# Altium PCB lm317-adjustable.PcbDoc
Units mm, origin at the board's own origin, x right, y up, seen from the top; angles counter-clockwise.
Board outline 63 x 22 mm, 2 copper layers (Top Layer, Bottom Layer), stack 1.569 mm thick; 10 components, 4 nets, 26 pads, 0 vias.
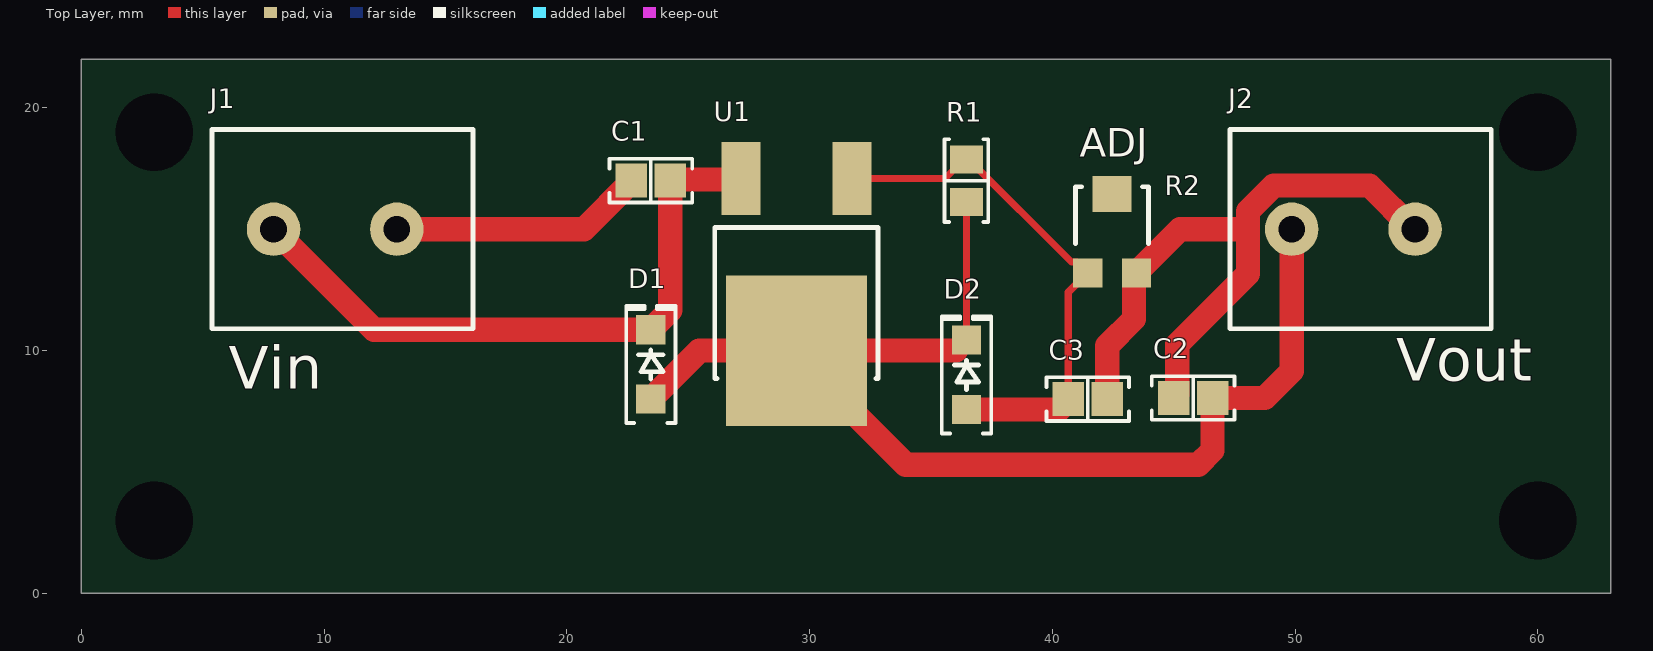
[diagram p0: Top Layer view]
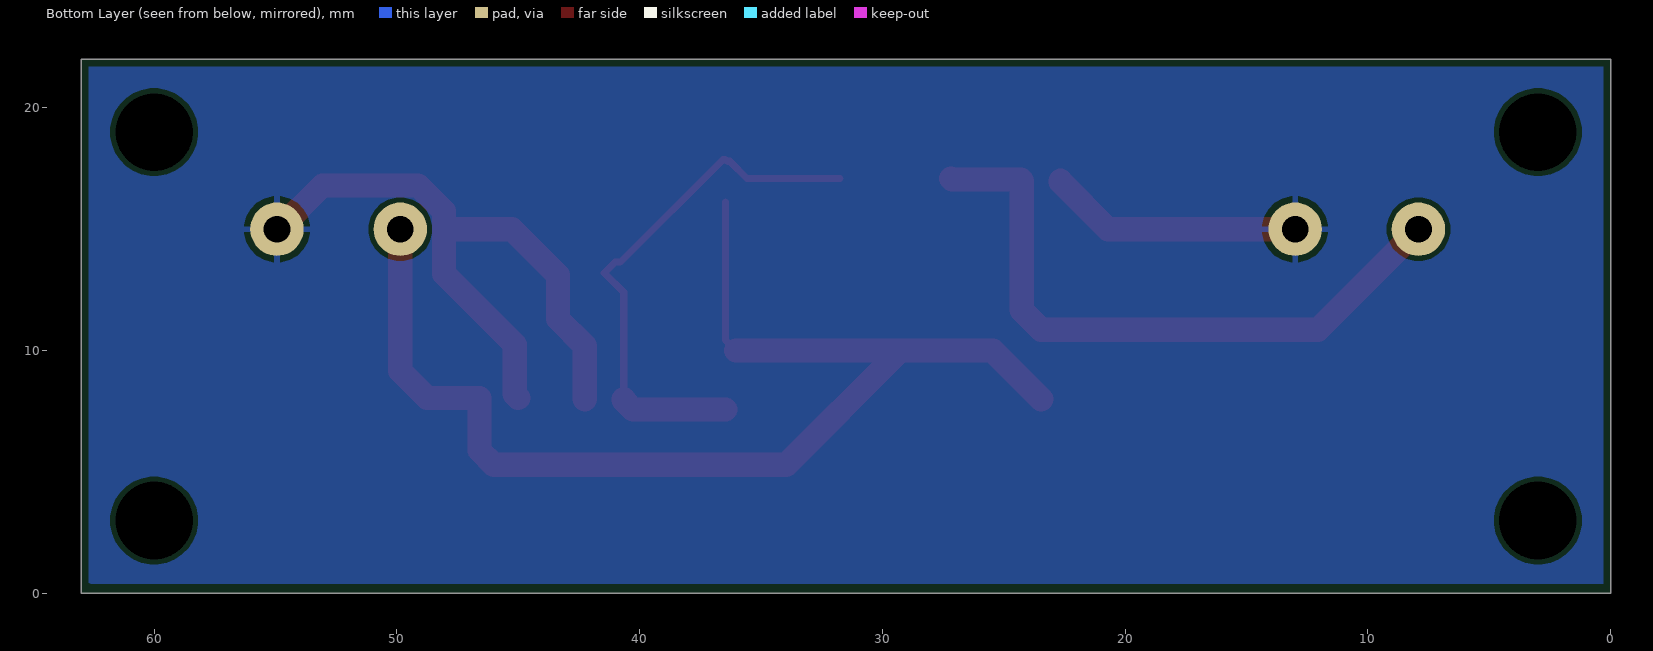
[diagram p1: Bottom Layer view, seen from below]
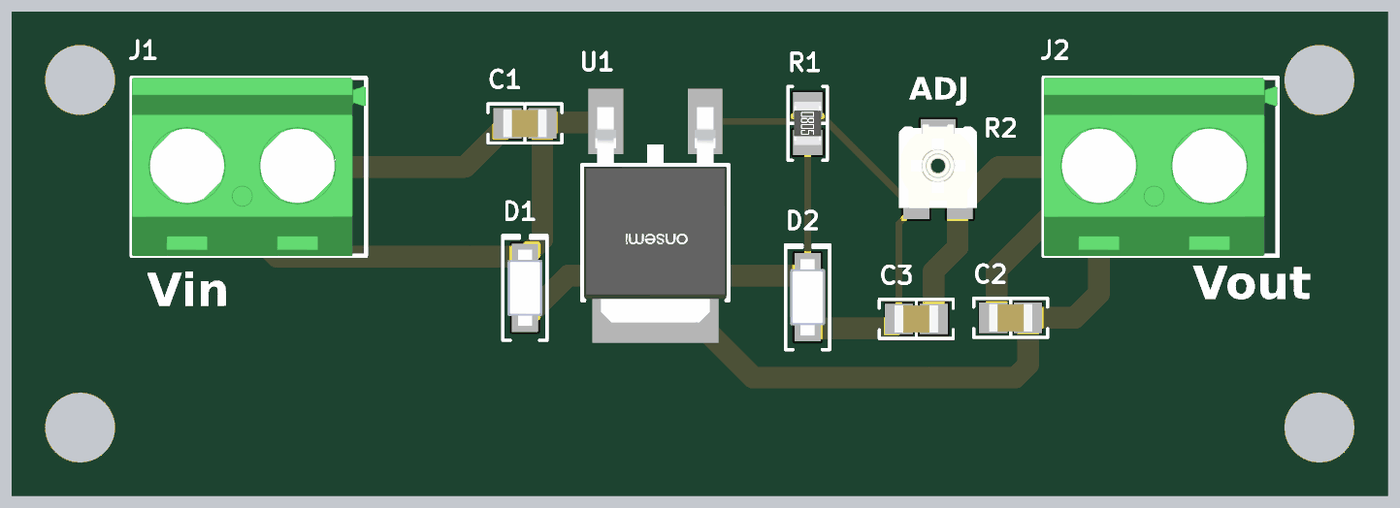
[diagram p2: 3D render of the assembled board from above, using the file's embedded part models]

## Layer stack, top to bottom
Top Solder: solder mask 0.01, Solder Resist, Dk 3.5
Top Layer: signal copper 0.035
Dielectric 1: core 1.4986, Core-043, Dk 4.3
Bottom Layer: signal copper 0.035
Bottom Solder: solder mask 0.01, Solder Resist, Dk 3.5

## Board outline
0,0 0,22 63,22 63,0

## Design rules (kind name [scope] priority, off if disabled: settings)
Clearance [All] p1: gap=0.2 ignorepadtopadclearanceinfootprint=FALSE
HoleSize [All] p1: absolutevalues=TRUE maxlimit=4 minlimit=0.025 maxpercent=80.000 minpercent=20.000
MinimumSolderMaskSliver [All] p1: minsoldermaskwidth=0.1
PolygonConnect [All] p1: connectstyle=Relief reliefconductorwidth=0.254 reliefentries=4 polygonreliefangle="90 Angle" airgapwidth=0.254
RoutingVias [All] p1: holewidth=0.711 width=1.27 viastyle="Through Hole" minholewidth=0.711 minwidth=1.27 maxholewidth=0.711 maxwidth=1.27
SilkToSolderMaskClearance [IsPad] p1: minsilkscreentomaskgap=0.05 clearancetoexposedcopper=TRUE
SolderMaskExpansion [All] p1: expansion=0.102 istentingtop=FALSE
SupplyNets "Schematic Supply Nets" [InNet('GND')] p1: voltage=0.000
Width [All] p1: maxlimit=1 minlimit=0.3 preferedwidth=0.3
27 further rules are at their usual default settings.

## Classes and differential pairs
component class lm317-adjustable: C1 C2 C3 D1 D2 R2 U1

## Components (designator, comment, footprint, x,y, rotation, side; value= is the part's Value field where it differs from the comment)
C1 "0.1 µF" "CAP 0805_2012"#1 23.46,17 r0 top
C2 "1 µF" "CAP 0805_2012"#1 45.8,8.05 r0 top
C3 "10 µF" "CAP 0805_2012"#2 41.46,8 r180 top
D1 "1N4007FLTR" SOD123F 23.46,9.43 r90 top
D2 "1N4007FLTR" SOD123F 36.46,9 r90 top
J1 "282837-2" "TE 282837-2" 10.46,15 r0 top
J2 "282837-2" "TE 282837-2" 52.4,15 r0 top
R1 "240" "RES 0805_2012" 36.46,17 r270 top
R2 "2.2 kOhms" "POT BOURNS TRIMPOT TC33" 42.46,15 r0 top
U1 "LM317" FP-369C-MFG 29.46,12.79 r180 top

## Footprints (in the part's own frame and the unit in brackets; to place one, negate y for a bottom-side part, rotate by r counter-clockwise, add the part's x,y. Pads: shape width x height; smd on the part's side, far side on the other; paste and mask are expansions set on the pad)
"CAP 0805_2012"#1 [mm] "Chip Capacitor, 2-Leads, Body 2.00x1.20mm, IPC Medium Density"
  rect 1.3x1.4 smd mask+0.05: 1(-0.8,0) 2(0.8,0)
  silkscreen extent -1.7,-0.9 1.7,0.9, body extent -1,-0.64 1,0.64, height 1.26
"CAP 0805_2012"#2 [mm] "Chip Capacitor, 2-Leads, Body 2.00x1.20mm, IPC Medium Density"
  rect 1.3x1.4 smd mask+0.102: 1(-0.8,0)
  rect 1.3x1.4 smd mask+0.05: 2(0.8,0)
  silkscreen extent -1.7,-0.9 1.7,0.9, body extent -1,-0.64 1,0.64, height 1.26
FP-369C-MFG [mm]
  rect 1.6x3 smd paste+0 mask+0: 1(-2.285,-4.3) 3(2.285,-4.3)
  rect 5.8x6.2 smd paste+0 mask+0: 4(0,2.79)
  silkscreen extent -3.36,-2.28 3.36,3.94, body extent -3.46,-5.9 3.46,5.99, height 0.25
"POT BOURNS TRIMPOT TC33" [mm] "Bourns Trimpot TC33X-1 - Open Frame 3mm x 3.8mm x 1.2mm"
  rect 1.2x1.2 smd: 1(-1,-1.8) 3(1,-1.8)
  rect 1.6x1.5 smd: 2(0,1.45)
  silkscreen extent -1.5,-0.6 1.5,1.75, body extent -1.8,-1.91 1.8,1.95, height 1.15
"RES 0805_2012" [mm] "Chip Resistor, 2-Leads, Body 2.00x1.25mm, IPC Medium Density"
  rect 1.15x1.35 smd: 1(-0.875,0) 2(0.875,0)
  silkscreen extent -1.7,-0.9 1.7,0.9, body extent -1,-0.62 1,0.63, height 0.6
SOD123F [mm] "SODFL, 2-Leads, Body 1.60x3.50mm, IPC Medium Density"
  rect 1.2x1.2 smd: 1(-1.43,0) 2(1.43,0)
  silkscreen extent -2.41,-1.02 2.41,1.02, body extent -1.75,-0.8 1.75,0.8, height 1.1
"TE 282837-2" [mm] "Wire to Board Terminal Block Horizontal with Board, 2 Postions, Body 10.76x8.2 mm, Pitch 5.08mm"
  round 2.2 hole 1.1: 1(-2.54,0) 2(2.54,0)
  silkscreen extent -5.08,-4.1 5.68,4.1, body extent -5.08,-4.1 5.68,4.1, height 10.3

## Part data
C1: library part CC0805MRX7R9BB104, "CAP CER 0.1UF 50V X7R 0805", Device Package="0805 (2012 Metric)", manufacturer=Yageo, Operating Temperature="-55°C ~ 125°C", Supplier Part Number 1=311-4351-1-ND, Temperature Coefficient=X7R, Tolerance=±20%, Voltage - Rated=50V, Applications="General Purpose", Capacitance="0.1 µF", componentlink1description=Datasheet, componentlink1url=https://www.yageo.com/upload/media/product/productsearch/datasheet/mlcc/UPY-GPHC_X7R_6.3V-to-50V_18.pdf, componentlink2description="DigiKey Link", componentlink2url=https://www.digikey.com/en/products/detail/yageo/CC0805MRX7R9BB104/5884281, lastupdated="06.04.2026 19:33:19", Lifecycle Status=Active, Minimum Order=1, Mounting Type="Surface Mount, MLCC", Package / Case="0805 (2012 Metric)", packaging=TapeAndReel, Part Number=CC0805MRX7R9BB104, Part Status=Active, partid=2475, price=0.01, series=CC, Size / Dimension="0.079\" L x 0.049\" W (2.00mm x 1.25mm)", Supplier 1=DigiKey, Thickness (Max)="0.037\" (0.95mm)"
C2: library part GCJ21BR71H105KA01L, "CAP CER 1UF 50V X7R 0805", Device Package="0805 (2012 Metric)", manufacturer="Murata Electronics", Operating Temperature="-55°C ~ 125°C", Ratings=AEC-Q200, Supplier Part Number 1=490-10667-1-ND, Temperature Coefficient=X7R, Tolerance=±10%, Voltage - Rated=50V, Applications="Automotive, Boardflex Sensitive", Capacitance="1 µF", componentlink1description=Datasheet, componentlink1url=https://www.murata.com/~/media/webrenewal/support/library/catalog/products/capacitor/mlcc/c03e.ashx?la=en-us, componentlink2description="DigiKey Link", componentlink2url=https://www.digikey.com/en/products/detail/murata-electronics/GCJ21BR71H105KA01L/4903512, Features="Soft Termination", lastupdated="06.04.2026 19:33:18", Lifecycle Status=Active, Minimum Order=1, Mounting Type="Surface Mount, MLCC", Package / Case="0805 (2012 Metric)", packaging=TapeAndReel, Part Number=GCJ21BR71H105KA01L, Part Status=Active, partid=2709, price=0.05, series=GCJ, Size / Dimension="0.079\" L x 0.049\" W (2.00mm x 1.25mm)", Supplier 1=DigiKey, Thickness (Max)="0.057\" (1.45mm)"
C3: library part GRM21BR61E106MA73L, "CAP CER 10UF 25V X5R 0805", Device Package="0805 (2012 Metric)", manufacturer="Murata Electronics", Operating Temperature="-55°C ~ 85°C", Supplier Part Number 1=490-10748-1-ND, Temperature Coefficient=X5R, Tolerance=±20%, Voltage - Rated=25V, Applications="General Purpose", Capacitance="10 µF", componentlink1description=Datasheet, componentlink1url=https://search.murata.co.jp/Ceramy/image/img/A01X/G101/ENG/GRM21BR61E106MA73-01.pdf, componentlink2description="DigiKey Link", componentlink2url=https://www.digikey.com/en/products/detail/murata-electronics/GRM21BR61E106MA73L/4905533, lastupdated="06.04.2026 19:32:54", Lifecycle Status=Active, Minimum Order=1, Mounting Type="Surface Mount, MLCC", Package / Case="0805 (2012 Metric)", packaging=TapeAndReel, Part Number=GRM21BR61E106MA73L, Part Status=Active, partid=9882, price=0.03, series=GRM, Size / Dimension="0.079\" L x 0.049\" W (2.00mm x 1.25mm)", Supplier 1=DigiKey, Thickness (Max)="0.055\" (1.40mm)"
D1 D2: "STANDARD RECTIFIER 1000V SOD-123", Capacitance @ Vr, F="15pF @ 4V, 1MHz", Current - Average Rectified (Io)=1A, Current - Reverse Leakage @ Vr="5µA @ 1000V", manufacturer="SMC Diode Solutions", Package / Case=SOD-123F, Supplier Device Package=SOD-123FL, Supplier Part Number 1=1655-1N4007FLCT-ND, Voltage - DC Reverse (Vr) (Max)=1000V, Voltage - Forward (Vf) (Max) @ If="1.1V @ 1A", componentlink1description=Datasheet, componentlink1url=http://www.smc-diodes.com/propdf/1N4001FL-1N4007FL%20N1646%20REV.A.pdf, componentlink2description="DigiKey Link", componentlink2url=http://digikey.com/product-detail/en/smc-diode-solutions/1N4007FLTR/1655-1N4007FLCT-ND/11657827, Diode Type=Standard, lastupdated="30.08.2020 20:59:55", Lifecycle Status=Active, Minimum Order=1, Mounting Type="Surface Mount", packaging=TapeAndReel, Part Number=1N4007FLTR, partid=3314, price=0.01, Speed="Standard Recovery >500ns, > 200mA (Io)", Supplier 1=DigiKey
J1 J2: "TERM BLK 2P SIDE ENT 5.08MM PCB", Color=Green, Current="13.5 A", manufacturer="TE Connectivity AMP Connectors", Supplier Part Number 1=A113320-ND, Voltage="300 V", componentlink1description=Datasheet, componentlink1url=https://www.te.com/commerce/DocumentDelivery/DDEController?Action=srchrtrv&DocNm=282837&DocType=Customer+Drawing&DocLang=English, componentlink2description="DigiKey Link", componentlink2url=https://www.digikey.com/en/products/detail/te-connectivity-amp-connectors/282837-2/2187973, Features="Interlocking (Side)", lastupdated="21.06.2022 15:00:23", Lifecycle Status=Active, Mating Orientation="Horizontal with Board", Minimum Order=1, Mounting Type="Through Hole", Number of Levels=1, packaging=Tray, Part Number=282837-2, Part Status=Active, Pitch="0.200\" (5.08mm)", Positions Per Level=2, price=0.31, series=Buchanan, Supplier 1=DigiKey, Wire Gauge="16-28 AWG", Wire Termination="Screw - Rising Cage Clamp"
R1: library part ERJ-PB6D2400V, "RES SMD 240 OHM 0.5% 1/4W 0805", Device Package="0805 (2012 Metric)", manufacturer="Panasonic Electronic Components", Operating Temperature="-55°C ~ 155°C", Power (Watts)="0.25W, 1/4W", Ratings=AEC-Q200, Resistance="240 Ohms", Supplier Device Package=0805, Supplier Part Number 1=P20946CT-ND, Temperature Coefficient=±50ppm/°C, Tolerance=±0.5%, componentlink1description=Datasheet, componentlink1url=https://industrial.panasonic.com/cdbs/www-data/pdf/RDM0000/AOA0000C328.pdf, componentlink2description="DigiKey Link", componentlink2url=https://www.digikey.com/en/products/detail/panasonic-electronic-components/ERJ-PB6D2400V/6213729, Composition="Thick Film", Features="Automotive AEC-Q200", Height - Seated (Max)="0.028\" (0.70mm)", lastupdated="05.04.2026 20:11:26", Lifecycle Status=Active, Minimum Order=1, Number of Terminations=2, Package / Case="0805 (2012 Metric)", packaging=TapeAndReel, Part Number=ERJ-PB6D2400V, Part Status=Active, partid=27745, price=0.02, series=ERJ-PB6, Size / Dimension="0.079\" L x 0.049\" W (2.00mm x 1.25mm)", Supplier 1=DigiKey
R2: library part TC33X-J-222E, "TRIMMER 2.2K OHM 0.1W J LEAD TOP", manufacturer="Bourns Inc.", Power (Watts)="0.1W, 1/10W", Resistive Material=Cermet, Supplier Part Number 1=TC33X-J-222E-ND, Temperature Coefficient=±250ppm/°C, Tolerance=±25%, Adjustment Type="Top Adjustment", componentlink2description="DigiKey Link", componentlink2url=http://digikey.com/product-detail/en/bourns-inc/TC33X-J-222E/TC33X-J-222E-ND/6163999, lastupdated="30.08.2020 21:01:56", Lifecycle Status=Active, Minimum Order=0, Mounting Type="Surface Mount", Number of Turns=1, Part Number=TC33X-J-222E, partid=29, price=0, Resistance="2.2 kOhms", series="Trimpot® TC33 - Open Frame", Size / Dimension="Rectangular - 0.150\" x 0.142\" Face x 0.047\" H (3.80mm x 3.60mm x 1.20mm)", Supplier 1=DigiKey, Termination Style="J Lead"
U1: library part CMP-00278-01440164-1, "LM317MADTRKG Linear Voltage Regulator, 500 mA, High PSRR, Adjustable, Positive Vout: 2%; TJ = 0°C to 125°C", Case/Package=DPAK, Manufacturer Lifecycle Status=ACTIVE, Max Input Voltage=40V, Max Operating Temperature=125°C, Max Output Current=250mA, Max Output Voltage=37V, Min Operating Temperature=0°C, Min Output Voltage=1.2V, Output Current=500mA, Output Voltage Accuracy=2%, Reference Voltage=1.275V, Accuracy=2%, Contact Plating=Tin, Halogen Free="Halogen Free", Lead Free="Lead Free", Lifecycle Status=Production, Min Input Voltage=40V, Mount="Surface Mount", NexarPartId=1440164, Number of Channels=1, Number of Outputs=1, Number of Pins=3, Number of Regulators=1, Output Type=Adjustable, Output Voltage=37V, packaging="Cut Tape (CT)", Polarity=Positive, Radiation Hardening=No, REACH SVHC="No SVHC", RoHS=Compliant, Schedule B="8542390000, 8542390000"

## Free pads (board coordinates)
  round 0 hole 3.2: H1(3,3) H2(60,3) H3(60,19) H4(3,19)

## Nets (pads, with @x,y where several pads share a name; then routed paths per layer and width w, separated by ;. In a path a pad name is that pad's centre, name@x,y a point inside that pad or via, vN(x,y) a via of type N, cw(c..) or ccw(c..) an arc to the next point about the centre after c; other vN are vias at no path point)
ADJ: C3.2 D2.1 R1.1 R2.1 U1.1 | length 21.8
  Top Layer w0.3: U1.1 35.575,17.09 36.285,17.8 R1.1@36.385,17.8 ; R1.1 36.56,17.875 40.785,13.65 41.01,13.65 R2.1 40.66,12.4 C3.2
  Top Layer w1: D2.1 40.28,7.57 40.66,7.95 C3.2
GND: C1.1 C2.1 C3.1 J1.2 J2.2 R2.3 | length 38.6
  Top Layer w1: J1.2 20.71,15 22.66,16.95 C1.1 ; C3.1 42.26,10.2 43.36,11.3 43.36,13.1 R2.3 45.26,15 48.06,15 ; C2.1 45.15,8.2 45.15,10.25 48.06,13.16 48.06,15 ; J2.2 54.863,15 53.063,16.8 49.114,16.8 48.06,15.746 48.06,15
Vin: C1.2 D1.2 J1.1 U1.3 | length 26.7
  Top Layer w1: J1.1 12.06,10.86 D1.2 24.26,11.66 C1.2 24.305,17.045 27.13,17.045 U1.3
Vout: C2.2 D1.1 D2.2 J2.1 R1.2 U1.4 | length 50.9
  Top Layer w0.3: D2.2@36.03,10 D2.2 R1.2
  Top Layer w1: D1.1 25.46,10 U1.4 ; D2.2@36.03,10 U1.4 ; J2.1 49.86,9.16 48.75,8.05 C2.2 46.6,5.886 46.014,5.3 33.96,5.3 29.46,9.8 U1.4
pads on no net: R2.2

## Polygon pours and split planes (outlines as drawn)
GND on Bottom Layer "GND_L02_P000" (solid, remove dead copper, pour order 0): 0.3,21.7 62.7,21.7 62.7,0.3 62.6,0.4 0.3,0.4

## Silkscreen, mask and mechanical layers (free items; w line width, h text height)
Top Overlay:
  text "ADJ" at 41.124,17.603 h2
  text "Vout" at 54.17,8.174 h3
  text "Vin" at 6.066,7.844 h3
Board Outline:
  the board outline again, w0.3